# Altium PCB Charge-Pump-Shield.PcbDoc
Units mil, origin at the board's own origin, x right, y up, seen from the top; angles counter-clockwise.
Board outline 1250 x 825 mil, 2 copper layers (Top Layer, Bottom Layer), stack 62.8 mil thick; 14 components, 17 nets, 47 pads, 5 vias.
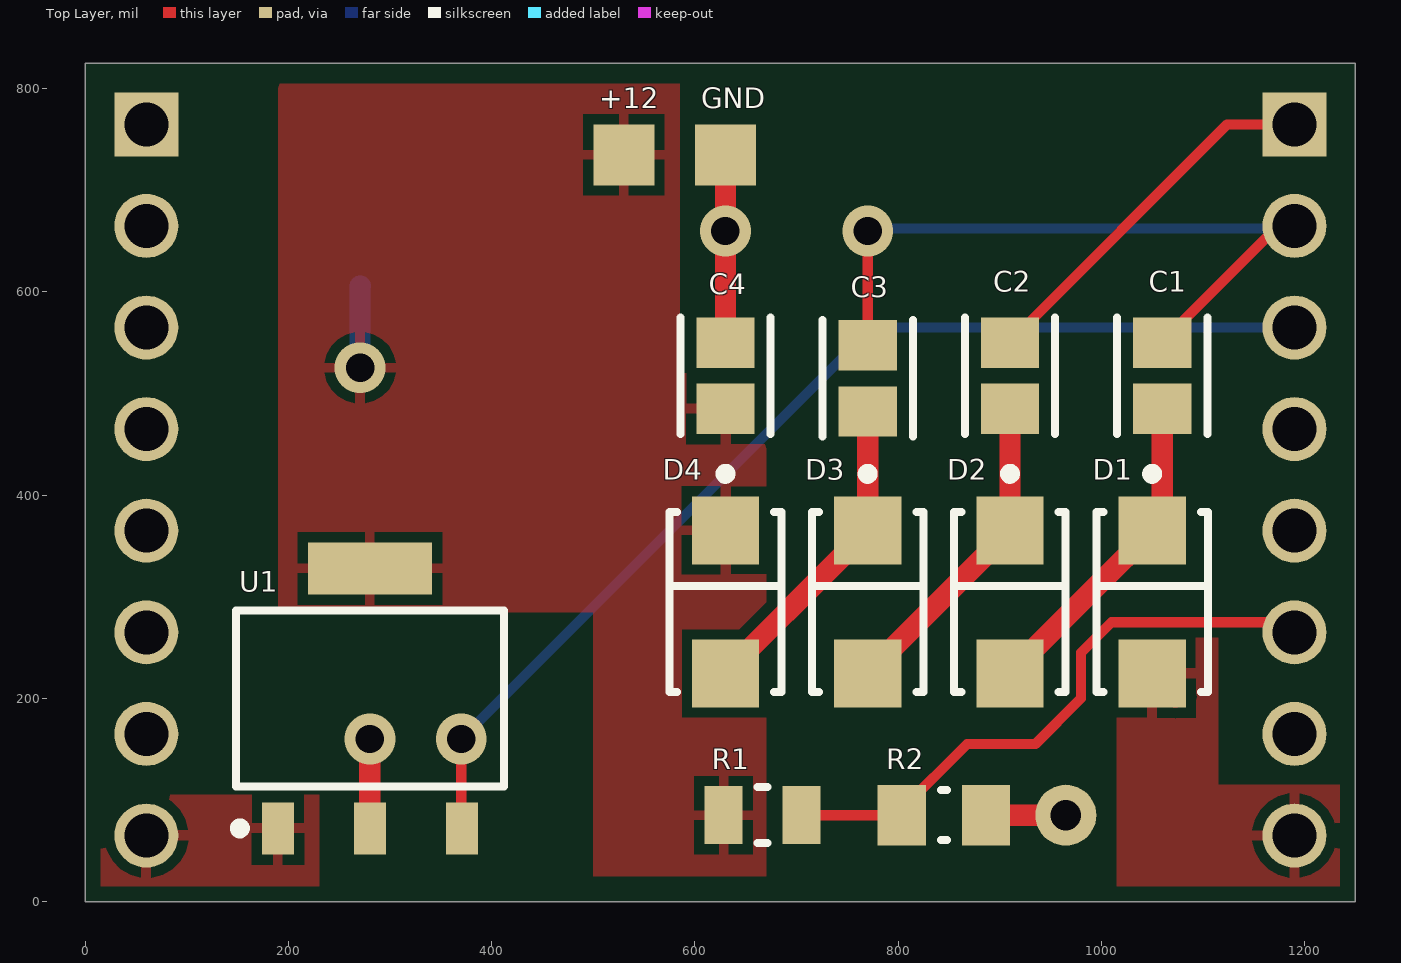
[diagram p0: Top Layer view]
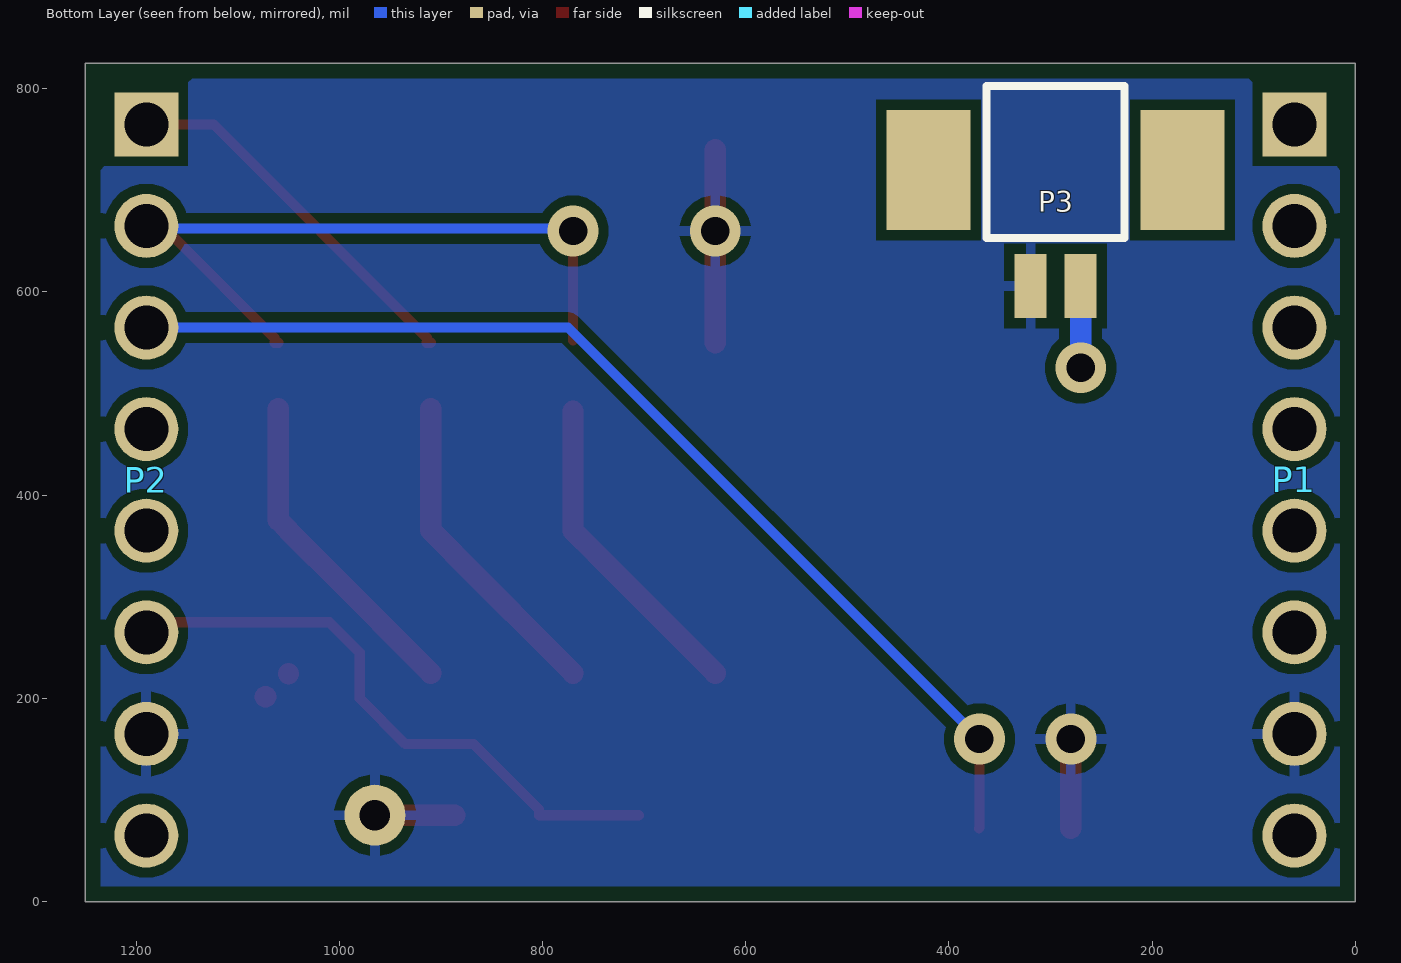
[diagram p1: Bottom Layer view, seen from below]
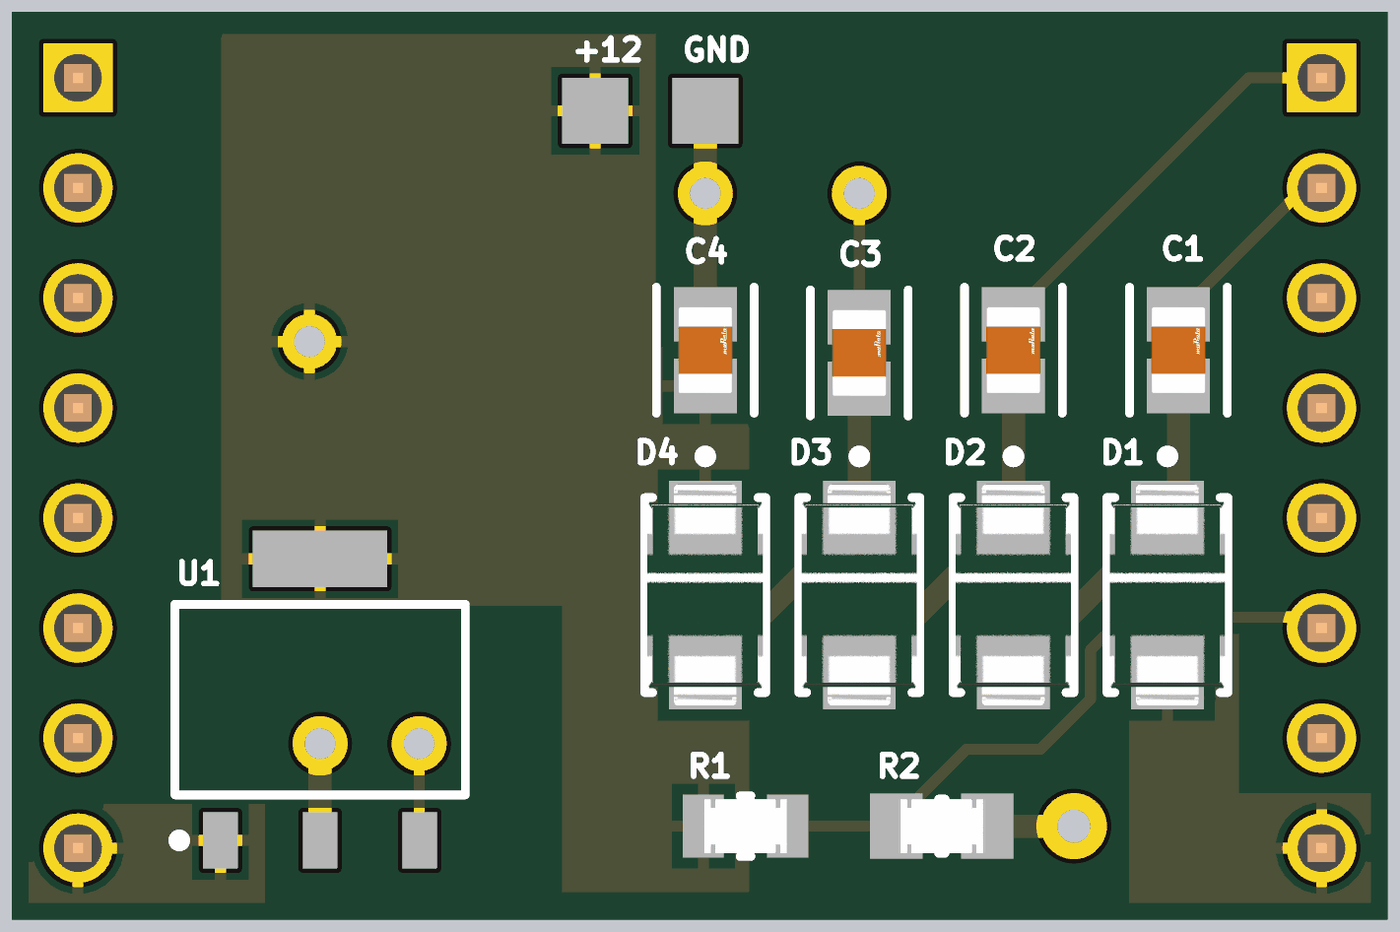
[diagram p2: 3D render of the assembled board from above, using the file's embedded part models]
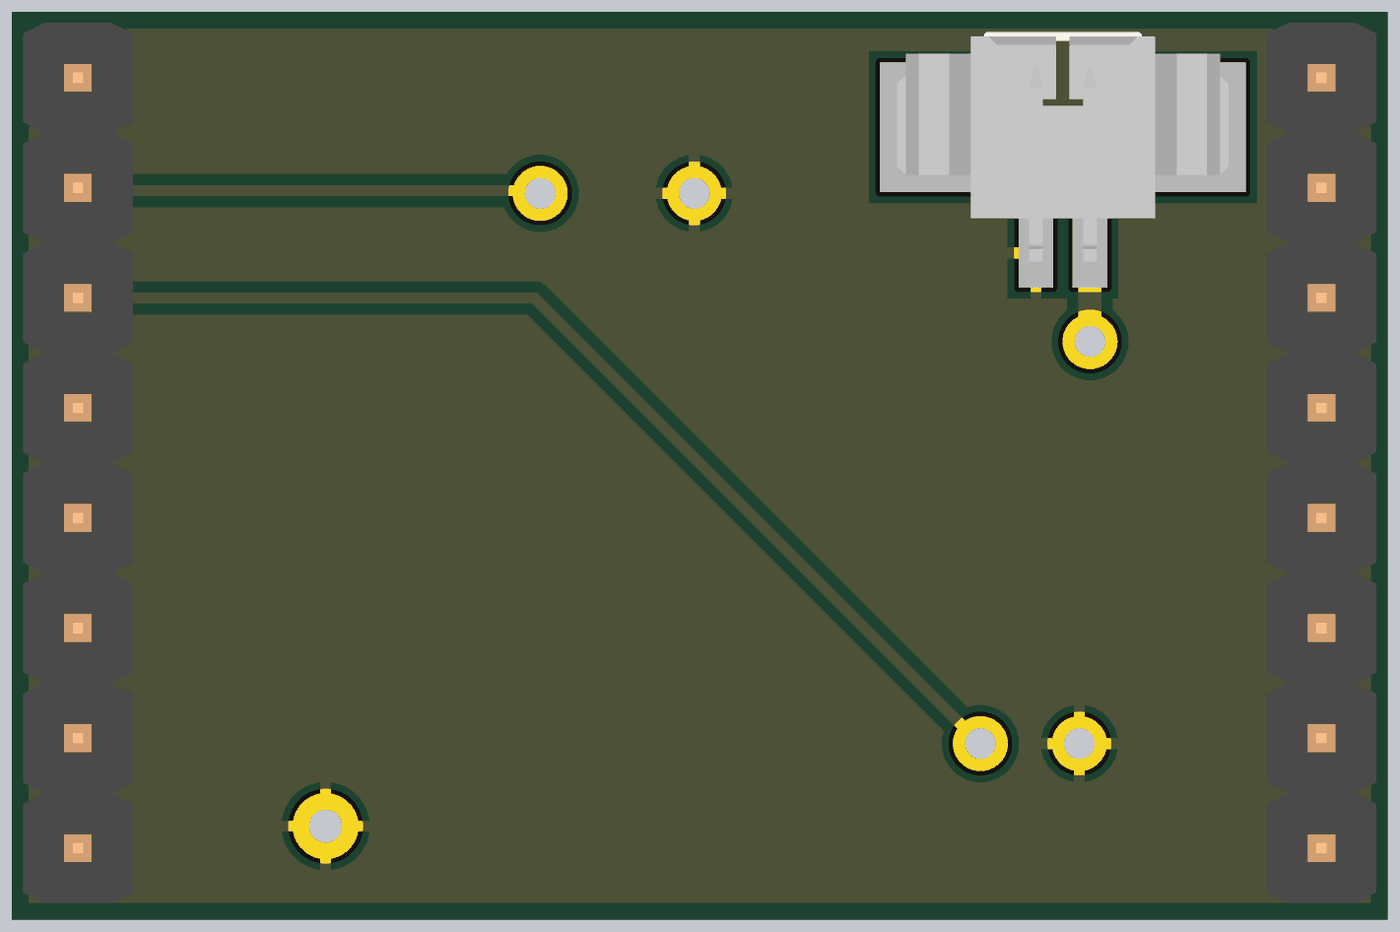
[diagram p3: 3D render of the assembled board from below, using the file's embedded part models]

## Layer stack, top to bottom
Top Solder: solder mask 1, Solder Resist, Dk 3.5
Top Layer: signal copper 1.4
Dielectric 1: dielectric 60, FR-4, Dk 4.8
Bottom Layer: signal copper 1.4
Bottom Solder: solder mask 1, Solder Resist, Dk 3.5

## Board outline
0,0 1250,0 1250,825 0,825

## Design rules (kind name [scope] priority, off if disabled: settings)
BoardOutlineClearance [All] p1: gap=15 ignorepadtopadclearanceinfootprint=FALSE
Clearance "Trace Spacing" [All] p1: gap=10 ignorepadtopadclearanceinfootprint=FALSE except(0: Arc-Hole Track-Hole SMDPad-Hole THPad-Hole Via-Hole Fill-Hole Poly-Hole Region-Hole Text-Hole)
Clearance [All] p2: gap=10 ignorepadtopadclearanceinfootprint=FALSE except(0: Arc-Hole Track-Hole SMDPad-Hole THPad-Hole Via-Hole Fill-Hole Poly-Hole Region-Hole Text-Hole)
HoleSize [All] p1: absolutevalues=TRUE maxlimit=100 minlimit=10 maxpercent=80.000 minpercent=20.000
HoleToHoleClearance [All] p1: gap=5 allowstackedmicrovias=TRUE
MinimumAnnularRing [All] p1: minimumring=5
PolygonConnect [All] p1: connectstyle=Relief reliefconductorwidth=10 reliefentries=4 polygonreliefangle="90 Angle" airgapwidth=10
RoutingVias [All] p1: holewidth=28 width=50 viastyle="Through Hole" minholewidth=28 minwidth=50 maxholewidth=28 maxwidth=50
SolderMaskExpansion [All] p1: expansion=4 istentingtop=FALSE
Width Width_1 [(InNet('+12') OR InNet('+RAW') OR InNet('+VM') OR InNet('GND')OR InNet('NetC1_1')OR InNet('NetC2_1') OR InNet('NetC3_1'))] p1: maxlimit=21 minlimit=21 preferedwidth=21
Width [All] p2: maxlimit=10 minlimit=6 preferedwidth=10
28 further rules are at their usual default settings.

## Components (designator, comment, footprint, x,y, rotation, side; value= is the part's Value field where it differs from the comment)
C1 "GRM21BR61E226ME44L" FP-GRM21B-0_2-e0_2_0_7-IPC_B 1060,517.51 r90 top
C2 "GRM21BR61E226ME44L" FP-GRM21B-0_2-e0_2_0_7-IPC_B 910,517.51 r90 top
C3 "GRM21BR61E226ME44L" FP-GRM21B-0_2-e0_2_0_7-IPC_B 770,515 r90 top
C4 "GRM21BR61E226ME44L" FP-GRM21B-0_2-e0_2_0_7-IPC_B 630,517.51 r90 top
D1 "SS14-E3/61T" FP-95400-MFG 1050,295 r270 top
D2 "SS14-E3/61T" FP-95400-MFG 910,295 r270 top
D3 "SS14-E3/61T" FP-95400-MFG 770,295 r270 top
D4 "SS14-E3/61T" FP-95400-MFG 630,295 r270 top
P1 "61300811121" 61300811121 60,415 r270 bottom
P2 "61300811121" 61300811121 1190,415 r270 bottom
P3 "53261-0271" MOLX-53261-0271_V 295,662.91 r0 bottom
R1 "CRCW080514K0FKEA" FP-CRCW0805-e3-MFG 666.61,85 r180 top
R2 "CRCW080510K0FKEA" FP-CRCW0805-e3-IPC_A 845,85 r0 top
U1 "ISP452" INF-SOT223_L 280,200 r90 top

## Footprints (in the part's own frame and the unit in brackets; to place one, negate y for a bottom-side part, rotate by r counter-clockwise, add the part's x,y. Pads: shape width x height; smd on the part's side, far side on the other; paste and mask are expansions set on the pad)
61300811121 [mm] "Pin Header, pitch 2.54 mm, THT, Vertical, single row, 8p"
  rect 1.6x1.6 hole 1.1: 1(-8.89,0)
  round 1.6 hole 1.1: 2(-6.35,0) 3(-3.81,0) 4(-1.27,0) 5(1.27,0) 6(3.81,0) 7(6.35,0) 8(8.89,0)
  body extent -10.16,-1.27 10.16,1.27, height 8.57
FP-95400-MFG [mm]
  rect 1.7x1.68 smd paste+0 mask+0: 1(-1.79,0) 2(1.79,0)
  silkscreen extent -3.32,-1.4 2.25,1.4, body extent -2.74,-1.5 2.74,1.5, height 0.25
FP-CRCW0805-e3-IPC_A [mil]
  rect 47.5x59.38 smd paste+0 mask+0: 1(-41.37,0) 2(41.37,0)
  silkscreen extent -3,-25 3,25, body extent -85,-49 85,49, height 10
FP-CRCW0805-e3-MFG [mm]
  rect 0.95x1.45 smd paste+0 mask+0: 1(-0.975,0) 2(0.975,0)
  silkscreen extent -0.13,-0.7 0.13,0.7, body extent -1.55,-0.82 1.55,0.82, height 0.25
FP-GRM21B-0_2-e0_2_0_7-IPC_B [mil]
  rect 49.4x57.33 smd paste+0 mask+0: 1(-32.51,0) 2(32.51,0)
  silkscreen extent -57,-44 57,44, body extent -67,-39 67,39, height 10
INF-SOT223_L [mm] "SOT223, 4-Leads, Body 6.5x3.5mm, Pitch 2.3mm, IPC High Density"
  rect 1.3x0.8 smd: 1(-3.25,2.3) 2(-3.25,0) 3(-3.25,-2.3)
  rect 1.3x3.1 smd: 4(3.25,0)
  silkscreen extent -3.37,-3.35 2.2,3.37, body extent -1.85,-3.35 1.85,3.35, height 1.7
MOLX-53261-0271_V [mm] "Header, 2-Leads, Pitch 1.25mm"
  rect 0.8x1.6 smd: 1(-0.625,1.45) 2(0.625,1.45)
  rect 2.1x3 smd: MP1(-3.175,-1.45) MP2(3.175,-1.45)
  silkscreen extent -1.72,-3.55 1.73,0.25, body extent -3.82,-3.55 3.83,1.65, height 3.41

## Part data
C1 C2 C3 C4: library part CMP-2007-03222-3, "Chip Multilayer Ceramic Capacitors for General Purpose, 0805, 22uF, X5R, 15%, 20%, 25V", Capacitance=22uF, Case Code (Imperial)=0805, Case Code (Metric)=2012, Dielectric=X5R, Max Operating Temperature=85°C, Min Operating Temperature=-55°C, Package Quantity=3000, Resistor Type=Ceramic, Tolerance=20%, Voltage=25V, Case/Package=0805, Depth=1.25mm, Height=1.25mm, Lead Free="Lead Free", Length=2mm, Material=Ceramic, Mount="Surface Mount", Packaging="Tape and Reel", REACH SVHC="No SVHC", Termination=SMD/SMT, Thickness=0.057inch, Voltage Rating=25V, Voltage Rating (DC)=25V, Weight=0.000335oz, Width=1.25mm
D1 D2 D3 D4: library part CMP-02539-000035-1, "DIODE SCHOTTKY 40V 1A DO214AC", Forward Current=1A, Manufacturer=Vishay, Max Junction Temp=+150°C, Max Repetitive Reverse Voltage=40V, Max Surge Forward Current=40A, Package=95400, Peak Reverse Current=0.2mA, Temperature="-65°C to +150°C", Temperature Range Low=-65°C, Automotive=No, Category=Diode, ComponentLink2Description=Datasheet, ComponentLink2URL=http://www.vishay.com/docs/88746/ss12.pdf, Device Class L1="Discrete Semiconductors", Device Class L2=Diodes, Device Class L3="Schottky Diodes", Digikey Description="DIODE SCHOTTKY 40V 1A DO214AC", Footprint Url=http://www.vishay.com/docs/95400/sma.pdf, Height=2.29mm, Lead Free=Yes, Manufacturer Part Number=SS14-E3/61T, Mouser Description="SS14 Series 40 V 1 A Surface Mount Schottky Barrier Rectifier - DO-214AC (SMA)", Octopart=https://octopart.com/ss14-e3%2F61t-vishay-39552847, RoHS=TRUE, Standoff Height=0mm, Temperature Range High=+150°C
P1 P2: library part CMP-1502-01076-1, "THT Vertical Pin Header WR-PHD, Pitch 2.54 mm, Single Row, 8 pins", Contact Resistance=20mOhm, Manufacturer="Wurth Elektronik", Operating Temperature=-40to105degC, Rated Current=3A, Withstanding Voltage=500VAC, Working Voltage=250VAC, Datasheet URL=https://katalog.we-online.de/em/datasheet/6130xx11121.pdf, Gender=Male, Manufacturer URL=http://www.we-online.de, Mounting Technology=THT, Orientation=Vertical, Package Reference=61300811121, Packaging=Bag, Part Number=61300811121, Pin Number=8, Pitch=2.54mm, Publisher=WurthElektronik, Row Number=Single
P3: library part CMP-2000-05633-1, "PicoBlade(TM) Header, Right Angle, -40 to 85 degC, 2-Pin SMD, RoHS, Tape and Reel", Current - Max=1A, Manufacturer=Molex, Package Description="2-Leads Header, Pitch 1.25 mm, Mated Height 3.4 mm", Package Version="Rev. H, 11/2014", Voltage - Max=125V, Brand=Molex, Contact Material=PhosphorBronze, Contact Plating=Tin, Current Rating=1A, Datasheet URL=http://www.molex.com/webdocs/datasheets/pdf/en-us/0532610271_PCB_HEADERS.pdf, Datasheet Version=03/2016, Factory Pack Quantity=1000, Housing Material=Thermoplastic, Manufacturer URL=http://www.molex.com/, Mounting Angle=Right, Mounting Style=SMD/SMT, Mounting Technology=SurfaceMount, Number of Positions=2, Number of Positions / Contacts=2, Number of Rows=1, Package Reference=53261-0271, Package URL=http://www.molex.com/pdm_docs/sd/532610271_sd.pdf, Packaging=Reel, Pitch=1.25mm, Product Category=1.25mmConnectors, Product Type=Headers, RoHS=Details, Series=53261, Termination Style=SMD, Tradename=PicoBlade, Type=Shrouded, Voltage Rating=125V
R1: library part CMP-2001-04956-2, "RES Thick Film, 14kΩ, 1%, 0.125W, 100ppm/°C, 0805", Case Code (Imperial)=0805, Case Code (Metric)=2012, Max Operating Temperature=155°C, Max Power Dissipation=125mW, Min Operating Temperature=-55°C, Package Quantity=10, Resistance=14kR, Temperature Coefficient=100ppm/°C, Tolerance=1%, Voltage Rating=150V, Case/Package=0805, Composition="Thick Film", Contact Plating=Tin, Depth=1.25mm, Features="Automotive AEC-Q200", Height=0.45mm, Lead Free="Lead Free", Length=2mm, Military Standard=Not, Mount="Surface Mount", Number of Pins=2, Number of Terminations=2, Packaging="Tape and Reel", Power Rating=125mW, Radiation Hardening=No, Termination=SMD/SMT, Voltage Rating (DC)=150V, Weight=0.000194oz, Width=1.25mm, Working Voltage=150V
R2: library part CMP-2001-04908-2, "RES Thick Film, 10kΩ, 1%, 0.125W, 100ppm/°C, 0805", Case Code (Imperial)=0805, Case Code (Metric)=2012, Max Operating Temperature=155°C, Min Operating Temperature=-55°C, Package Quantity=5000, Power Rating=125mW, Resistance=10kR, Temperature Coefficient=100ppm/°C, Tolerance=1%, Voltage Rating=150V, Case/Package=0805, Composition="Thick Film", Contact Plating=Tin, Depth=1.25mm, Height=0.45mm, Lead Free="Lead Free", Length=2mm, Military Standard=Not, Packaging="Tape and Reel", Radiation Hardening=No, Termination=SMD/SMT, Voltage Rating (DC)=150V, Weight=0.000194oz, Width=1.25mm
U1: library part CMP-1095-00141-1, "Smart Power High-Side-Switch for Industrial Applications, 5 to 34 V Operating, -30 to 85 degC, SOT223, Reel, Green", Load Current (typ)="0.7Â A", Manufacturer=Infineon, Operating Voltage Range (max)="34 V", Operating Voltage Range (min)="5 V", Channels=1, ComponentLink1Description="Manufacturer URL", ComponentLink1URL=http://www.infineon.com/, ComponentLink2Description=Datasheet, ComponentLink2URL=http://www.infineon.com/dgdl/ISP452_20060301.pdf?folderId=db3a304412b407950112b408e8c90004&fileId=db3a304412b407950112b42957ef40c3, ComponentLink3Description="Package Specification", ComponentLink3URL=http://www.infineon.com/dgdl/SOT223-Package_Overview.pdf?folderId=db3a30431936bc4b0119530470b03c3d&fileId=db3a30431936bc4b0119531d40b93c5c, Green=TRUE, IL (nom)min - all channels active="0.7Â A", IL (nom)min - one channel active="0.8Â A", IL (SC)="1.5Â A", IL (SCp)="1.5Â A", Mounting Technology="Surface Mount", PackageDescription="4-Pin Small Outline Transistor Package, 6.5 x 3.5 mm Body, 2.3 mm Pitch", PackageReference=SOT223, PackageVersion=Apr-08, Packing=Reel, PartNumber=ISP452, Ptot (max)="1.8Â W", RON (max) @ Tj max="400 mOhm", RON @ 25 degC="200 mOhm (max)", toff (max)="150 us", ton (max)="100 us"

## Free pads (board coordinates)
  rect 60x60 smd: 2(530,735) 3(630,735)
  round 60 hole 30: 5(965,85)

## Via types
v1: diameter 50, hole 28, Top Layer to Bottom Layer, 5 vias

## Nets (pads, with @x,y where several pads share a name; then routed paths per layer and width w, separated by ;. In a path a pad name is that pad's centre, name@x,y a point inside that pad or via, vN(x,y) a via of type N, cw(c..) or ccw(c..) an arc to the next point about the centre after c; other vN are vias at no path point)
+3V3: P1.6
+12: C4.1 D4.1 P3.1 pad.2 R1.2 U1.4 | length 80.5
  Bottom Layer w21: v1(270.38,525.38) P3.1
+RAW: D1.2 P2.8 | length 7.9
  Top Layer w21: D1.2@1050,224.13 D1.2 ; D1.2@1072.57,201.56 D1.2@1072.96,201.56 ; P2.8@1185,70 P2.8
+VM: P1.8 U1.1
BOOST: P2.3 U1.3 | length 1075.9
  Top Layer w10: v1(370,160) 370,72.6 U1.3
  Bottom Layer w10: v1(370,160) 775,565 P2.3
CLOCK_1: C1.2 C3.2 P2.2 | length 705.1
  Top Layer w10: C3.2@770,552.51 v1(770,660) ; C1.2 C1.2@1063.97,550.02 ; C1.2@1063.97,555.02 1163.81,654.86 1179.86,654.86 P2.2
  Bottom Layer w10: v1(770,660) 772.5,662.5 1187.5,662.5 P2.2
CLOCK_2: C2.2 P2.1 | length 367
  Top Layer w10: C2.2 C2.2@913.97,550.02 ; C2.2@913.97,555.02 1123.95,765 P2.1
GND: C4.2 P1.7 P2.7 P3.2 pad.3 pad.5 R2.2 U1.2 | length 356.6
  Top Layer w21: U1.2 v1(280,160) ; C4.2 v1(630,660) pad.3@630,740 ; R2.2 pad.5
NetC1_1: C1.1 D1.1 D2.2 | length 322.6
  Top Layer w21: D2.2 910,224.92 959.5,274.42 959.5,274.58 995.02,310.1 1050,365.08 D1.1 1060,375.47 C1.1
NetC2_1: C2.1 D2.1 D3.2 | length 318.5
  Top Layer w21: D3.2 770,224.92 887.43,342.35 887.43,342.9 D2.1 C2.1
NetC3_1: C3.1 D3.1 D4.2 | length 316
  Top Layer w21: D4.2 630,224.92 747.43,342.35 747.43,342.51 770,365.08 D3.1 C3.1
RESET: P1.1
RX: P1.4
SCL: P1.2
SDA: P1.3
TX: P1.5
VOLTAGE_DIVIDER: P2.6 R1.1 R2.1 | length 597.7
  Top Layer w10: R1.1 R2.1 803.63,90.94 867.69,155 935,155 980,200 980,245 1010,275 1180,275 P2.6
pads on no net: P2.4 P2.5 P3.MP1 P3.MP2

## Polygon pours and split planes (outlines as drawn)
+12 on Top Layer "+12_L01_P004" (solid, pour order 4): 670,25 670,520 590,520 585,520 585,535 585,805 185,805 190,800 190,285 500,285 500,25
+RAW on Top Layer "+RAW_L01_P001" (solid, pour order 1): 1015,260 1115,260 1115,115 1240,115 1240,15 1015,15
+VM on Top Layer "+VM_L01_P002" (solid, pour order 2): 10,105 230,105 230,15 10,15
GND on Bottom Layer "GND_L02_P005" (solid, pour order 5): 0,825 1250,825 1250,0 5,0 0,5

## Silkscreen, mask and mechanical layers (free items; w line width, h text height)
Top Overlay:
  text "+12" at 506,781 h20
  text "GND" at 606,781 h20